# Altium PCB Rainbow F103C_Pcb.PcbDoc
Units mil, origin at the board's own origin, x right, y up, seen from the top; angles counter-clockwise.
Board outline 1920 x 720 mil, 2 copper layers (Top Layer, Bottom Layer); 64 components, 47 nets, 148 pads, 30 vias.
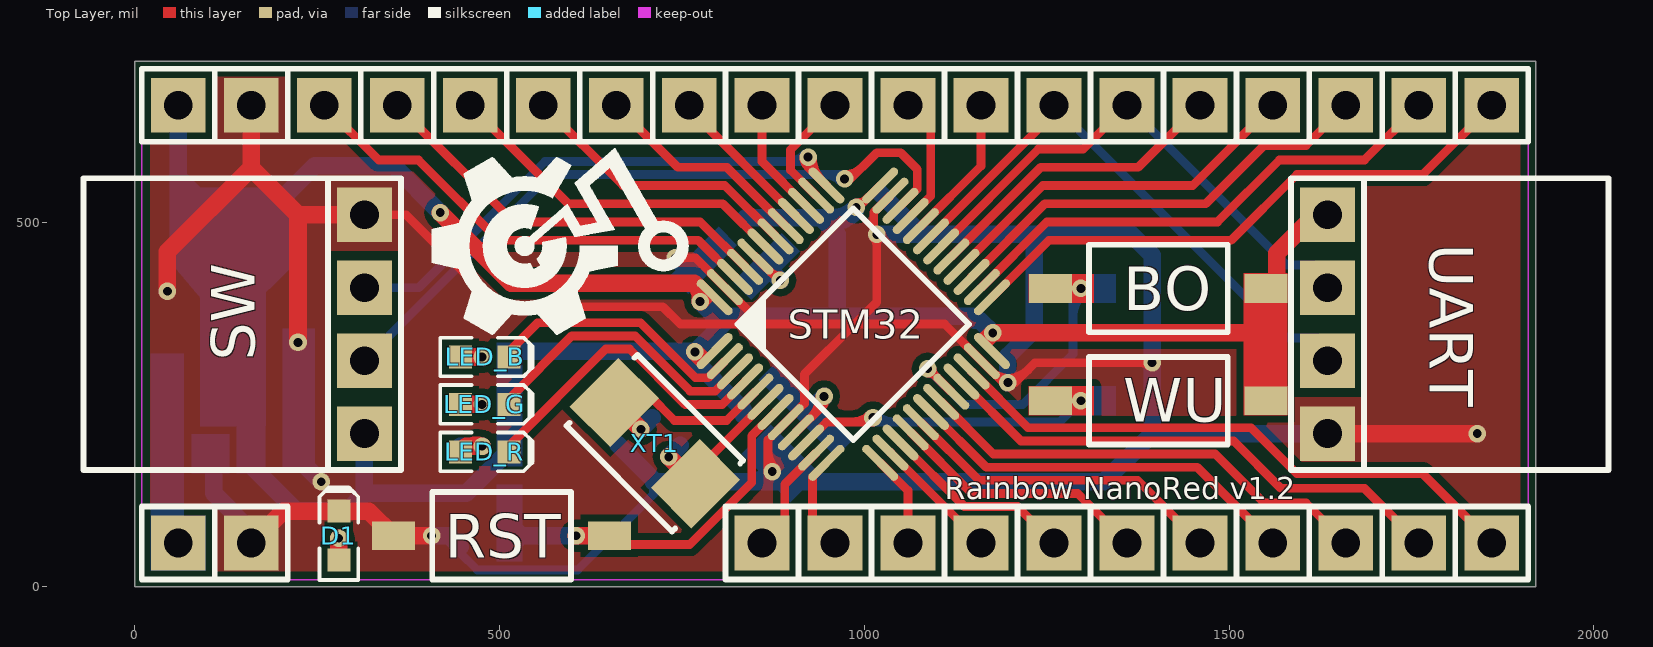
[diagram p0: Top Layer view]
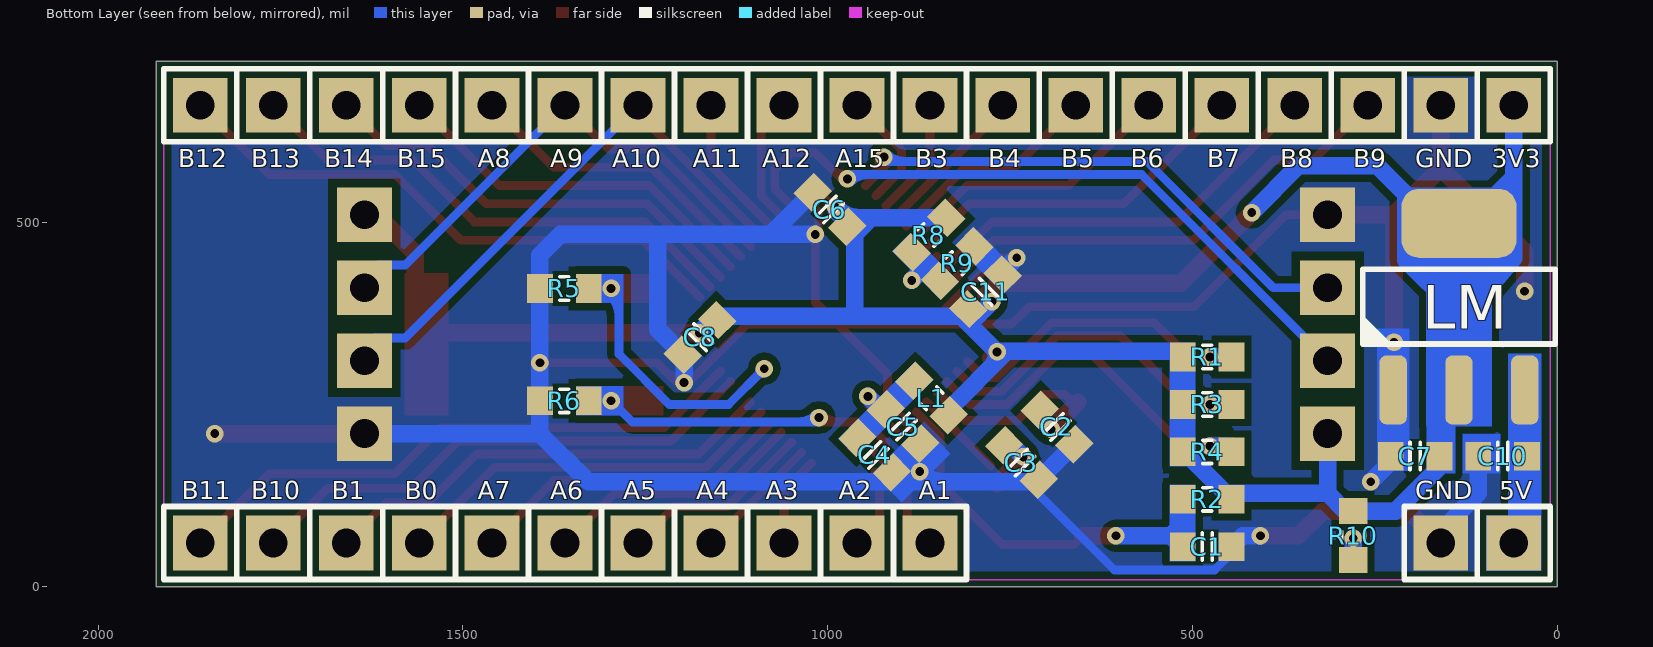
[diagram p1: Bottom Layer view, seen from below]

## Layer stack, top to bottom
Top Layer: signal copper 1.4
Dielectric: dielectric 12.6, FR-4, Dk 4.8
Bottom Layer: signal copper 1.4

## Board outline
0,720 1920,720 1920,0 0,0

## Design rules (kind name [scope] priority, off if disabled: settings)
Clearance Clearance_Polygon [InPolygon] p1: gap=10
Clearance [All] p2: gap=6
ComponentClearance [All] p1: gap=0 collisioncheckmode=3 verticalgap=0 showdistances=FALSE
MinimumSolderMaskSliver [All] p1: minsoldermaskwidth=5
PlaneConnect [All] p1: planeconnectstyle=Direct reliefexpansion=20 reliefentries=4 reliefconductorwidth=10 reliefairgap=10
PolygonConnect [All] p1: connectstyle=Direct reliefconductorwidth=10 reliefentries=4 polygonreliefangle="90 Angle" airgapwidth=10
RoutingVias [All] p1: holewidth=12 width=24 viastyle="Through Hole" minholewidth=12 minwidth=24 maxholewidth=50 maxwidth=100
SilkToSilkClearance [All] p1: silktosilkclearance=1
SilkToSolderMaskClearance [IsPad] p1: minsilkscreentomaskgap=1 clearancetoexposedcopper=TRUE
SolderMaskExpansion [All] p1: expansion=0
Width [All] p1: maxlimit=50 minlimit=6 preferedwidth=10
23 further rules are at their usual default settings.

## Components (designator, comment, footprint, x,y, rotation, side; value= is the part's Value field where it differs from the comment)
3V3 "HDR1X1_180_2.54" HDR1X1_180_2.54 60,660 r270 bottom (schematic designator VCC)
5V "HDR1X1_180_2.54" HDR1X1_180_2.54 60,60 r180 bottom
A1 "HDR1X1_180_2.54" HDR1X1_180_2.54 860,60 r270 bottom
A2 "HDR1X1_180_2.54" HDR1X1_180_2.54 960,60 r270 bottom
A3 "HDR1X1_180_2.54" HDR1X1_180_2.54 1060,60 r0 bottom
A4 "HDR1X1_180_2.54" HDR1X1_180_2.54 1160,60 r270 bottom
A5 "HDR1X1_180_2.54" HDR1X1_180_2.54 1260,60 r270 bottom
A6 "HDR1X1_180_2.54" HDR1X1_180_2.54 1360,60 r270 bottom
A7 "HDR1X1_180_2.54" HDR1X1_180_2.54 1460,60 r270 bottom
A8 "HDR1X1_180_2.54" HDR1X1_180_2.54 1460,660 r270 bottom
A9 "HDR1X1_180_2.54" HDR1X1_180_2.54 1360,660 r270 bottom
A10 "HDR1X1_180_2.54" HDR1X1_180_2.54 1260,660 r270 bottom
A11 "HDR1X1_180_2.54" HDR1X1_180_2.54 1160,660 r270 bottom
A12 "HDR1X1_180_2.54" HDR1X1_180_2.54 1060,660 r270 bottom
A15 "HDR1X1_180_2.54" HDR1X1_180_2.54 960,660 r270 bottom
B0 "HDR1X1_180_2.54" HDR1X1_180_2.54 1560,60 r270 bottom
B1 "HDR1X1_180_2.54" HDR1X1_180_2.54 1660,60 r270 bottom
B3 "HDR1X1_180_2.54" HDR1X1_180_2.54 860,660 r270 bottom
B4 "HDR1X1_180_2.54" HDR1X1_180_2.54 760,660 r270 bottom
B5 "HDR1X1_180_2.54" HDR1X1_180_2.54 660,660 r270 bottom
B6 "HDR1X1_180_2.54" HDR1X1_180_2.54 560,660 r270 bottom
B7 "HDR1X1_180_2.54" HDR1X1_180_2.54 460,660 r270 bottom
B8 "HDR1X1_180_2.54" HDR1X1_180_2.54 360,660 r270 bottom
B9 "HDR1X1_180_2.54" HDR1X1_180_2.54 260,660 r270 bottom
B10 "HDR1X1_180_2.54" HDR1X1_180_2.54 1760,60 r270 bottom
B11 "HDR1X1_180_2.54" HDR1X1_180_2.54 1860,60 r270 bottom
B12 "HDR1X1_180_2.54" HDR1X1_180_2.54 1860,660 r270 bottom
B13 "HDR1X1_180_2.54" HDR1X1_180_2.54 1760,660 r270 bottom
B14 "HDR1X1_180_2.54" HDR1X1_180_2.54 1660,660 r270 bottom
B15 "HDR1X1_180_2.54" HDR1X1_180_2.54 1560,660 r270 bottom
BO "BT_TACT_3x6_180" BT_TACT_3x6_180 1255,409 r0 top locked
C1 "Cap_0603" CAP_0603 480,55 r180 bottom
C2 "Cap_0603" CAP_0603 685.86,219.14 r45 bottom
C3 "Cap_0603" CAP_0603 734.75,170.25 r45 bottom
C4 "Cap_0603" CAP_0603 935.64,180.86 r45 bottom
C5 "Cap_0603" CAP_0603 896.75,219.75 r45 bottom
C6 "Cap_0603" CAP_0603 997,517 r225 bottom
C7 "Cap_0603" CAP_0603 195,179 r180 bottom
C8 "Cap_0603" CAP_0603 1175,342 r135 bottom
C10 "Cap_0603" CAP_0603 75,179 r180 bottom
C11 "Cap_0603" CAP_0603 783.68,404.39 r315 bottom
D1 "LED_0603_YELLOW" LED_0603_YELLOW 280,70.31 r90 top
GND "HDR1X1_180_2.54" HDR1X1_180_2.54 160,660 r270 bottom
GND "HDR1X1_180_2.54" HDR1X1_180_2.54 160,60 r270 bottom (schematic designator GND1)
L1 "Ind_0603" IND_0603 857.86,258.64 r45 bottom
LED_B "LED_0603_BLUE" LED_0603_BLUE 480,315 r0 top
LED_G "LED_0603_GREEN" LED_0603_GREEN 480,250 r0 top
LED_R "LED_0603_RED" LED_0603_RED 480,185 r0 top
LM "LM1117" SOT223 135,384 r90 bottom locked
R1 "Res_0603" RES_0603 480,315 r0 bottom
R2 "Res_0603" RES_0603 480,120 r0 bottom
R3 "Res_0603" RES_0603 480,250 r0 bottom
R4 "Res_0603" RES_0603 480,185 r0 bottom
R5 "Res_0603" RES_0603 1361,409 r0 bottom
R6 "Res_0603" RES_0603 1361,255 r0 bottom
R8 "Res_0603" RES_0603 861.46,482.18 r135 bottom
R9 "Res_0603" RES_0603 822.57,443.28 r135 bottom
R10 "Res_0603" RES_0603 280,70.31 r90 bottom
RST "BT_TACT_3x6_180" BT_TACT_3x6_180 355,70 r0 top locked
STM32 "STM32F103C" STM32F_48 985,360 r45 top locked
SW "HDR1X4_90F_2.54" HDR1X4_90F_2.54 315,210 r90 top locked
UART "HDR1X4_90F_2.54" HDR1X4_90F_2.54 1635,510 r270 top locked
WU "BT_TACT_3x6_180" BT_TACT_3x6_180 1255,255 r0 top locked
XT1 "XTAL_5032" XTAL_5032 713,197 r135 top locked

## Footprints (in the part's own frame and the unit in brackets; to place one, negate y for a bottom-side part, rotate by r counter-clockwise, add the part's x,y. Pads: shape width x height; smd on the part's side, far side on the other; paste and mask are expansions set on the pad)
BT_TACT_3x6_180 [mm]
  rect 1.5x1 smd: 1(0,0) 2(7.509,0)
  silkscreen extent 1.35,-1.52 6.17,1.52, body extent 0.17,-1.75 7.37,1.75, height 5
CAP_0603 [mm] "Chip Capacitor, Body 1.6x0.8mm, 0603, IPC Medium Density"
  rect 0.9x1 smd: 1(-0.85,0) 2(0.85,0)
  Top Layer pour cut-out: -0.4,0.6 0.4,0.6 0.4,-0.6 -0.4,-0.6
  silkscreen extent -0.18,-0.48 0.18,0.48, body extent -0.85,-0.45 0.85,0.45, height 0.89
HDR1X1_180_2.54 [mm] "Connector; Header; 2 Position"
  rect 1.905x1.905 hole 1: 1(0,0)
  silkscreen extent -1.27,-1.27 1.27,1.27, body extent -1.27,-1.27 1.27,1.27, height 7.58
HDR1X4_90F_2.54 [mm] "Connector; Header; 2 Position"
  rect 1.905x1.905 hole 1: 1(0,0) 2(2.54,0) 3(5.08,0) 4(7.62,0)
  silkscreen extent -1.27,-1.27 8.89,9.78, body extent -1.39,-0.16 9.02,9.9, height 2.52
IND_0603 [mm] "Chip bead, Body 1.6x0.8mm, 0603, IPC Medium Density"
  rect 0.9x1 smd: 1(-0.85,0) 2(0.85,0)
  Top Layer pour cut-out: -0.4,0.6 0.4,0.6 0.4,-0.6 -0.4,-0.6
  silkscreen extent -0.15,-0.41 0.15,0.41, body extent -0.8,-0.4 0.8,0.4, height 0.79
LED_0603_BLUE [mm] "Chip Capacitor, 2-Leads, Body 1.6x0.8mm, IPC Medium Density"
  rect 0.8x0.8 smd: 1(-0.85,0) 2(0.85,0)
  Top Layer pour cut-out: -0.5,0.5 0.5,0.5 0.5,-0.5 -0.5,-0.5
  silkscreen extent -1.55,-0.67 1.68,0.67, body extent -0.8,-0.4 0.8,0.4, height 0.75
LED_0603_GREEN [mm] "Chip Capacitor, 2-Leads, Body 1.6x0.8mm, IPC Medium Density"
  rect 0.8x0.8 smd: 1(-0.85,0) 2(0.85,0)
  Top Layer pour cut-out: -0.5,0.5 0.5,0.5 0.5,-0.5 -0.5,-0.5
  silkscreen extent -1.55,-0.67 1.67,0.67, body extent -0.8,-0.4 0.8,0.4, height 0.75
LED_0603_RED [mm] "Chip Capacitor, 2-Leads, Body 1.6x0.8mm, IPC Medium Density"
  rect 0.8x0.8 smd: 1(-0.85,0) 2(0.85,0)
  Top Layer pour cut-out: -0.5,0.5 0.5,0.5 0.5,-0.5 -0.5,-0.5
  silkscreen extent -1.55,-0.67 1.68,0.67, body extent -0.8,-0.4 0.8,0.4, height 0.75
LED_0603_YELLOW [mm] "Chip Capacitor, 2-Leads, Body 1.6x0.8mm, IPC Medium Density"
  rect 0.8x0.8 smd: 1(-0.85,0) 2(0.85,0)
  Top Layer pour cut-out: -0.5,0.5 0.5,0.5 0.5,-0.5 -0.5,-0.5
  silkscreen extent -1.55,-0.67 1.67,0.67, body extent -0.8,-0.4 0.8,0.4, height 0.75
RES_0603 [mm]
  rect 0.9x1 smd: 1(-0.85,0) 2(0.85,0)
  Top Layer pour cut-out: -0.4,0.6 0.4,0.6 0.4,-0.6 -0.4,-0.6
  silkscreen extent -0.15,-0.41 0.15,0.41, body extent -0.87,-0.47 0.88,0.48, height 0.54
SOT223 [mm] "SOT223, 4-Leads, Body 6.7x7.3mm (max), Pitch 2.29mm, IPC Medium Density"
  rrect50% 2.4x0.95 smd: 1(-2.9,2.29) 2(-2.9,0) 3(-2.9,-2.29)
  rrect50% 2.4x4 smd: 4(2.9,0)
  silkscreen extent -1.3,-3.35 1.3,3.35, body extent -3.65,-3.35 3.65,3.35, height 1.8
STM32F_48 [mm] "TSQFP, 48-Leads, Body 9.0x9.0mm (max), Pitch 0.50mm, IPC Medium Density"
  oval 1.65x0.3 smd: 1(-4.075,2.75) 2(-4.075,2.25) 3(-4.075,1.75) 4(-4.075,1.25) 5(-4.075,0.75) 6(-4.075,0.25) 7(-4.075,-0.25) 8(-4.075,-0.75) 9(-4.075,-1.25) 10(-4.075,-1.75) 11(-4.075,-2.25) 12(-4.075,-2.75) 25(4.075,-2.75) 26(4.075,-2.25) 27(4.075,-1.75) 28(4.075,-1.25) 29(4.075,-0.75) 30(4.075,-0.25) 31(4.075,0.25) 32(4.075,0.75) 33(4.075,1.25) 34(4.075,1.75) 35(4.075,2.25) 36(4.075,2.75)
  oval 0.3x1.65 smd: 13(-2.75,-4.075) 14(-2.25,-4.075) 15(-1.75,-4.075) 16(-1.25,-4.075) 17(-0.75,-4.075) 18(-0.25,-4.075) 19(0.25,-4.075) 20(0.75,-4.075) 21(1.25,-4.075) 22(1.75,-4.075) 23(2.25,-4.075) 24(2.75,-4.075) 37(2.75,4.075) 38(2.25,4.075) 39(1.75,4.075) 40(1.25,4.075) 41(0.75,4.075) 42(0.25,4.075) 43(-0.25,4.075) 44(-0.75,4.075) 45(-1.25,4.075) 46(-1.75,4.075) 47(-2.25,4.075) 48(-2.75,4.075)
  silkscreen extent -2.85,-2.85 2.85,2.85, body extent -4.5,-4.5 4.5,4.5, height 1.59
XTAL_5032 [mm] "Molded Capacitor, 2-Leads, Body 5.0x3.2mm, IPC Medium Density"
  rect 2x2.4 smd: 1(-2,0) 2(2,0)
  silkscreen extent -2.6,-1.75 2.6,1.75, body extent -2.5,-1.6 2.5,1.6, height 1

## Part data
3V3 5V A1 A2 A3 A4 A5 A6 A7 A8 A9 A10 A11 A12 A15 B0 B1 B3 B4 B5 B6 B7 B8 B9 B10 B11 B12 B13 B14 B15 GND GND SW UART: "Header"
BO RST WU: "Switch"
C1 C2 C3 C4 C5 C6 C7 C8 C10 C11: "Capacitor"
D1 LED_B LED_G LED_R: "LED"
L1: "Inductor"
LM: "Power"
R1 R2 R3 R4 R5 R6 R8 R9 R10: "Resistor"
STM32: "MCU"
XT1: "Crystal Oscillator"

## Via types
v1: diameter 24, hole 12, Top Layer to Bottom Layer, 30 vias

## Nets (pads, with @x,y where several pads share a name; then routed paths per layer and width w, separated by ;. In a path a pad name is that pad's centre, name@x,y a point inside that pad or via, vN(x,y) a via of type N, cw(c..) or ccw(c..) an arc to the next point about the centre after c; other vN are vias at no path point)
3V3: 3V3.1 BO.2 C6.2 C7.2 C8.2 C11.2 L1.1 LM.2 LM.4 R1.2 R2.1 R3.2 R4.2 R8.2 R10.2 STM32.1 STM32.24 STM32.36 STM32.48 SW.1 UART.1 WU.2 | length 3983.6
  Top Layer w12: v1@989,526 ccw(c989,547.45) STM32.36@1004.17,532.28 ; v1@991.89,520 STM32.36
  Top Layer w24: v1(419,513) 516,416 767,416 ; v1(768,322) v1@776.47,313.53 ; v1@783,399 v1(775,391) ccw(c746.74,395.74) 767,416 ; 783,400 767,416 ; v1@1168,340 v1(1176,348) 1550.64,348 BO.2 ; WU.2 BO.2 ; UART.1 1618,510 1565,457 1565,423.36 BO.2
  Bottom Layer w24: 60,450 115,385 ; LM.4@60,472.15 60,561 ; 3V3.1 60,561 ; LM.4@75,460 130,395 195,450 ; 145,385 207.83,447.83 ; C7.2 161.54,164.46 222.22,103.78 R10.2 290.78,103.78 315,128 ; SW.1 315,128 ; v1(419,513) 355,577 247,577 168.17,498.17 LM.4 122.83,498.17 60,561 ; R4.2 511.54,185 454.54,128 315,128 ; R1.2@513.46,323 769,323 817,371 C8.2@1148,371 ; v1@757.17,320 834.19,242.98 L1.1 ; v1(768,322) ccw(c798.97,322) 777.07,300.1 ; v1(775,391) C11.2@804.5,361.5 ; R8.2 940.16,505.84 ; 954.81,505.84 ccw(c954.81,554.19) v1(989,520) ; 963,372 963,483 940.16,505.84 ; C6.2@972.34,503.34 v1(989,520) ; C8.2 1158.34,365.66 v1(1176,348) ; 940.16,505.84 972.46,505.84 ccw(c972.46,522.58) v1(989,520)
5V: 5V.1 C10.2 LM.3 | length 188.1
  Bottom Layer w24: 5V.1@41.54,78.46 C10.2@41.54,194 ; C10.2@44.84,197.31 LM.3
BO: BO.1 R5.1 STM32.20 | length 492.3
  Top Layer w12: v1@1087,293 cw(c1087,276.68) STM32.20@1098.54,288.22 ; v1(1087,299) 1087.76,299 STM32.20 ; v1@1093,299 ccw(c1105.66,299) STM32.20@1096.71,290.05
  Bottom Layer w12: v1@1087,293 cw(c1087,278.51) 1097.24,288.76 cw(c1107.49,299) v1@1093,299 ; v1(1087,299) 1136,250 1217,250 1286,319 1286,398 v1(1297,409) ; 1286,367.96 cw(c1338.04,367.96) v1@1301.24,404.76 ; 1286,396.93 cw(c1309.07,396.93) v1@1292.76,413.24
BOOT0: R8.1 R9.1 STM32.44 | length 89.1
  Top Layer w12: STM32.44 v1@884.12,419.12 ; STM32.44@871.76,431.49 ccw(c885,444.73) v1@885,426
  Bottom Layer w24: 865.81,439.19 v1(885,420)
GND: C1.2 C2.1 C3.1 C4.1 C5.1 C6.1 C7.1 C8.1 C10.1 C11.1 D1.2 GND.1 LM.1 R5.2 R6.2 R9.2 RST.1 STM32.8 STM32.23 STM32.35 STM32.47 SW.4 UART.4 | length 6103
  Top Layer w12: 224,510 SW.4@314.54,510 ; SW.4 372,510 498,384 724,384 747.81,360.19 987,360.19 ; v1(741,451) 768.73,451 STM32.47 859.54,360.19 ; v1@745.24,446.76 cw(c755.49,436.51) 755.49,451 cw(c755.49,465.49) v1@745.24,455.24 ; v1@868,158 868,201.24 STM32.8 918,251.24 918,291.19 987,360.19 ; 868,186.97 ccw(c902.97,186.97) v1@878.24,162.24 ; v1@1012.76,478.76 cw(c1002.51,468.51) 1017,468.51 cw(c1031.49,468.51) v1@1021.24,478.76 ; STM32.35 1013,513.27 1013,487 v1(1017,483) 1017,390.19 987,360.19 ; STM32.23@1175.28,295 ccw(c1197,316.72) 1197,286 ccw(c1197,324.63) 1224.31,297.31 ; v1@1390.22,302.76 ccw(c1379.98,292.51) 1379.98,307 ccw(c1379.98,321.49) v1@1390.22,311.24 ; v1(1394.46,307) 1234,307 1207,280 v1(1197,280) 1190.27,280 STM32.23 1110.08,360.19 987,360.19
  Top Layer w24: v1(45,405) 45,459 160,574 ; GND.1@160,60 203.78,103.78 D1.2 321.22,103.78 RST.1 v1(407,70) ; GND.1@160,656 160,574 ; v1(224,335) 224,510 ; SW.4 224,510 ; UART.4 v1(1840,210) ; 160,574 224,510
  Bottom Layer w12: C1.2 446.54,46.46 470,23 607,23 711.09,127.09 C3.1 ; v1@741,447.08 v1(741,451) ; C11.1 C11.1@760.02,431.98
  Bottom Layer w24: C10.1 108.46,127.99 GND.1@160,76.46 ; C7.1@225.16,197.31 LM.1 LM.1@235,279.67 ; C7.1@228.46,171.54 v1(256,144) ; SW.4@306,510 SW.4 ; v1(407,70) 431.54,70 C1.2 ; C2.1 C3.1 ; C3.1@711.09,144 1328.46,144 1394.46,210 ; v1(741,451) C11.1@760.02,431.98 ; 840.2,144 ccw(c840.2,191.8) v1(874,158) ; 888,144 v1(874,158) ; C4.1@907.8,144 cw(c907.8,191.8) v1(874,158) ; v1(1017,483) 1233,483 ; C6.1 1078.33,483 1233,483 ; v1(1197,280) C8.1@1197,316.67 ; C8.1 1233,352.67 1233,483 ; R6.2 1394.46,210 ; UART.4 1394.46,210 ; 1233,483 1366,483 1394.46,454.54 R5.2 v1(1394.46,307) 1394.46,210
LED_B: LED_B.2 STM32.2 | length 360.3
  Top Layer w12: LED_B.2 513.46,323 552.39,361.92 693.29,361.92 768.79,286.42 786.14,286.42 STM32.2
LED_G: LED_G.2 STM32.3 | length 395.7
  Top Layer w12: LED_G.2 513.46,258 599.39,343.92 685.83,343.92 761.34,268.42 761.58,268.42 762,268 795.56,268 STM32.3
LED_R: LED_R.2 STM32.4 | length 431.1
  Top Layer w12: LED_R.2 513.46,193.46 645.92,325.92 678.37,325.92 753.88,250.42 754.13,250.42 754.54,250 805.4,250 STM32.4
NetD1_1: D1.1 R10.1 | length 59.4
  Top Layer w24: D1.1 v1(280,66.57)
  Bottom Layer w24: R10.1 v1(280,66.57)
NetLED_B_1: LED_B.1 R1.1 | length 59.4
  Top Layer w24: LED_B.1 v1(476.25,315)
  Bottom Layer w24: R1.1 v1(476.25,315)
NetLED_G_1: LED_G.1 R3.1 | length 59.4
  Top Layer w24: LED_G.1 v1(476.25,250)
  Bottom Layer w24: R3.1 v1(476.25,250)
NetLED_R_1: LED_R.1 R4.1 | length 95
  Top Layer w24: LED_R.1 cw(c468.34,163.2) v1(476.25,193) 454.54,193 LED_R.1
  Bottom Layer w24: R4.1@446.54,193 v1(476.25,193)
PA1: A1.1 STM32.11 | length 167
  Top Layer w12: A1.1 881,60 891,70 891,140.73 STM32.11
PA2: A2.1 STM32.12 | length 113.1
  Top Layer w12: STM32.12@935.61,157.5 929,150.89 929,91 A2.1
PA3: A3.1 STM32.13 | length 125.8
  Top Layer w12: STM32.13 1060,131.89 A3.1
PA4: A4.1 STM32.14 | length 175.4
  Top Layer w12: STM32.14@1035.94,184.06 A4.1
PA5: A5.1 STM32.15 | length 267.4
  Top Layer w12: STM32.15 1137.56,110 1210,110 A5.1
PA6: A6.1 STM32.16 | length 359.5
  Top Layer w12: STM32.16 1147.4,128 1292.46,128 A6.1@1360,60.46
  Top Layer w24: A6.1 A6.1@1360,60.46
PA7: A7.1 STM32.17 | length 451.3
  Top Layer w12: STM32.17 1157.24,146 1374.46,146 A7.1@1460,60.46
  Top Layer w24: A7.1 A7.1@1460,60.46
PA8: A8.1 STM32.29 | length 426.9
  Top Layer w12: STM32.29 1241.76,575 1375.46,575 A8.1@1460,659.54
  Top Layer w24: A8.1@1460,659.54 A8.1
PA9: A9.1 STM32.30 UART.2 | length 720.3
  Top Layer w12: STM32.30 1238.92,600 1300,600 A9.1
  Bottom Layer w10: UART.2@1616,441 1635,422 UART.2
  Bottom Layer w12: A9.1 1579,441 UART.2@1616,441
PA10: A10.1 STM32.31 UART.3 | length 779.9
  Top Layer w12: STM32.31 1260,648.92 A10.1
  Bottom Layer w12: A10.1 1579,341 1622,341 1635,328 UART.3
PA11: A11.1 STM32.32 | length 199.8
  Top Layer w12: STM32.32 1160,576.76 A11.1@1160,659.54
  Top Layer w24: A11.1@1160,659.54 A11.1
PA12: A12.1 STM32.33 | length 175.5
  Top Layer w12: A12.1 A12.1@1090,630 ; STM32.33 1091,535.6 A12.1@1091,630
PA15: A15.1 STM32.38 | length 163.8
  Top Layer w12: STM32.38 899,571.27 899,599 A15.1
PB0: B0.1 STM32.18 | length 543.2
  Top Layer w12: STM32.18 1167.08,164 1456.46,164 B0.1@1560,60.46
  Top Layer w24: B0.1 B0.1@1560,60.46
PB1: B1.1 STM32.19 | length 635
  Top Layer w12: STM32.19 1176.92,182 1481,182 1548,115 1605.46,115 B1.1@1660,60.46
  Top Layer w24: B1.1 B1.1@1660,60.46
PB3: B3.1 STM32.39 | length 162.8
  Top Layer w12: B3.1 860,582.44 STM32.39
PB4: B4.1 STM32.40 | length 207
  Top Layer w12: B4.1@760,654.6 STM32.40
PB5: B5.1 STM32.41 | length 300.9
  Top Layer w12: B5.1@660,659.54 744.54,575 811.76,575 STM32.41
PB6: B6.1 STM32.42 | length 392.7
  Top Layer w12: B6.1@560,659.54 669.54,550 808.92,550 STM32.42
PB7: B7.1 STM32.43 | length 484.6
  Top Layer w12: B7.1@460,659.54 594.54,525 806.08,525 STM32.43
PB8: B8.1 STM32.45 | length 568.7
  Top Layer w12: B8.1@360,659.54 519.54,500 775.4,500 STM32.45
  Top Layer w24: B8.1@360,659.54 B8.1
PB9: B9.1 STM32.46 | length 660.6
  Top Layer w12: B9.1@260,659.54 334.54,585 389,585 499,475 772.56,475 STM32.46
  Top Layer w24: B9.1@260,659.54 B9.1
PB10: B10.1 STM32.21 | length 718.7
  Top Layer w12: STM32.21 1214.6,200 1506,200 1571,135 1685.46,135 B10.1@1760,60.46
  Top Layer w24: B10.1 B10.1@1760,60.46
PB11: B11.1 STM32.22 | length 810.6
  Top Layer w12: STM32.22 1224.44,218 1530,218 1593,155 1765.46,155 B11.1@1860,60.46
  Top Layer w24: B11.1 B11.1@1860,60.46
PB12: B12.1 STM32.25 | length 794.3
  Top Layer w12: STM32.25 1253.11,475 1503,475 1593,565 1765.46,565 B12.1@1860,659.54
  Top Layer w24: B12.1@1860,659.54 B12.1
PB13: B13.1 STM32.26 | length 702.4
  Top Layer w12: STM32.26 1250.27,500 1484,500 1569,585 1685.46,585 B13.1@1760,659.54
  Top Layer w24: B13.1@1760,659.54 B13.1
PB14: B14.1 STM32.27 | length 610.6
  Top Layer w12: STM32.27 1247.44,525 1468,525 1548,605 1605.46,605 B14.1@1660,659.54
  Top Layer w24: B14.1@1660,659.54 B14.1
PB15: B15.1 STM32.28 | length 518.4
  Top Layer w12: STM32.28 1244.6,550 1450,550 B15.1
RST: C1.1 R2.2 RST.2 STM32.7 | length 543.7
  Top Layer w12: RST.2 662.64,58 761,58 846,143 846,207.08 STM32.7
  Top Layer w24: v1(605,70) RST.2
  Bottom Layer w24: C1.1@515,55 C1.1@530,70 ; R2.2@515,120 515,85 C1.1@530,70 ; v1(605,70) C1.1@530,70
SW_C: STM32.37 SW.3 | length 830.5
  Top Layer w12: v1@917,589 ccw(c936.04,589) 922.58,575.54 ; v1@918.89,584.63 cw(c909.93,575.11) 923,575.11 ; v1(923,589) 923,575.11 ; v1@927.11,584.63 ccw(c936.07,575.11) 923,575.11 ; v1@929,589 ccw(c977.01,589) STM32.37@943.06,555.05 ; STM32.37 923,575.11
  Bottom Layer w12: SW.3 389.54,410 562.54,583 v1@923,583 ; 894.03,583 ccw(c894.03,617.97) v1@918.76,593.24
SW_D: STM32.34 SW.2 | length 1000.3
  Top Layer w12: v1@973,565 ccw(c973,598.8) 996.9,574.9 ; v1@976.09,554.09 1017,595 1050,595 1072.75,572.25 1072.75,545.18 STM32.34
  Bottom Layer w12: SW.2 570,565 v1@973,565 ; 944.03,565 cw(c944.03,530.03) v1@968.76,554.76
  other v1: 973,559
VDDA: C4.2 C5.2 L1.2 STM32.9 | length 126.5
  Top Layer w12: STM32.9 945,250.4 v1(945,261) ; STM32.9@927.26,232.67 ccw(c898.93,261) v1@939,261
  Bottom Layer w24: C5.2@923.91,239.91 v1(945,261)
WU: R6.1 STM32.10 WU.1 | length 478.1
  Top Layer w12: STM32.10 948.44,226 v1@1012,226 ; 983.03,226 ccw(c983.03,260.97) v1@1007.76,236.24
  Bottom Layer w12: v1@1012,226 1268,226 v1(1297,255) ; v1@1016.24,236.24 ccw(c1040.97,260.97) 1040.97,226 ; v1@1291,255 cw(c1276.51,255) 1286.76,244.76 cw(c1297,234.51) v1@1297,249
  other v1: 1012,232
X1: C2.2 STM32.5 XT1.2 | length 294.7
  Top Layer w12: XT1.2@665.32,253.68 675.64,264 704,264 740,228 811.24,228 STM32.5
  Top Layer w24: XT1.2 v1(694,216)
  Bottom Layer w24: v1(694,216) C2.2@709.52,231.52
X2: C3.2 STM32.6 XT1.1 | length 198.7
  Top Layer w12: XT1.1@776.68,165.6 STM32.6
  Top Layer w24: v1(732,178) XT1.1
  Bottom Layer w24: v1(732,178) C3.2@747.91,193.91

## Polygon pours and split planes (outlines as drawn)
GND on Top Layer "Top Layer-No Net" (solid, remove dead copper, pour order 6): 0,720 1920,720 1920,0 0,0
GND on Bottom Layer "Top Layer-No Net" (solid, remove dead copper, pour order 8): 0,720 1920,720 1920,0 0,0

## Keep-outs
Keep-Out Layer:
  lines w2: 10,10 1910,10 1910,710 10,710 10,10

## Other copper
Top Layer:
  rectangle net 3V3: 1520,235 1580,430
  rectangle net WU: 1225,235 1315,275
  rectangle net BO: 1225,389 1315,429
  pour cut-out: 1585,560 1685,560 1685,260 1585,260
  pour cut-out: 265,460 365,460 365,160 265,160
Bottom Layer:
  rectangle net GND: 78.2,155.38 129.8,209.72
  rectangle net 3V3: 140,155.38 179.25,220
  rectangle net 3V3: 90,220 180,498.17
  rectangle net 3V3: 48,449 220,547
  rectangle net GND: 203,159 247,354
  rectangle net 5V: 22,22 98,98
  rectangle net 5V: 22,22 68,320
  rectangle net 3V3: 495.75,165 532,335
  rectangle net RST: 495.75,35 532,140
  region net GND: 938.67,155.67 871.57,222.78 831.39,182.61 898.5,115.5
  region net VDDA: 986,203 880,309 854.88,283.88 960.88,177.88
  region net GND: 825.78,468.44 800.56,493.65 733.45,426.55 758.67,401.33
  region net BOOT0: 912,460 886.78,485.22 819.78,418.22 845,393
  rectangle net WU: 1280,235 1345.25,275
  rectangle net BO: 1280,389 1345.25,429
  pour cut-out: 210,610 210,710 1910,710 1910,610
  pour cut-out: 810,10 810,110 1910,110 1910,10
  pour cut-out: 265,460 365,460 365,160 265,160
  pour cut-out: 1585,560 1685,560 1685,260 1585,260

## Silkscreen, mask and mechanical layers (free items; w line width, h text height)
Top Overlay:
  drawing of 2754 lines, arcs and shapes, not listed
  text "Rainbow NanoRed v1.2" at 1110,120 h30
Mechanical 1:
  the board outline again, w0

## Dimensions
1920,0 to 1920,720 on Mechanical 13
0,720 to 1920,720 on Mechanical 13